# EAGLE board Keyboard (EAGLE 6.3), part 1 of 2
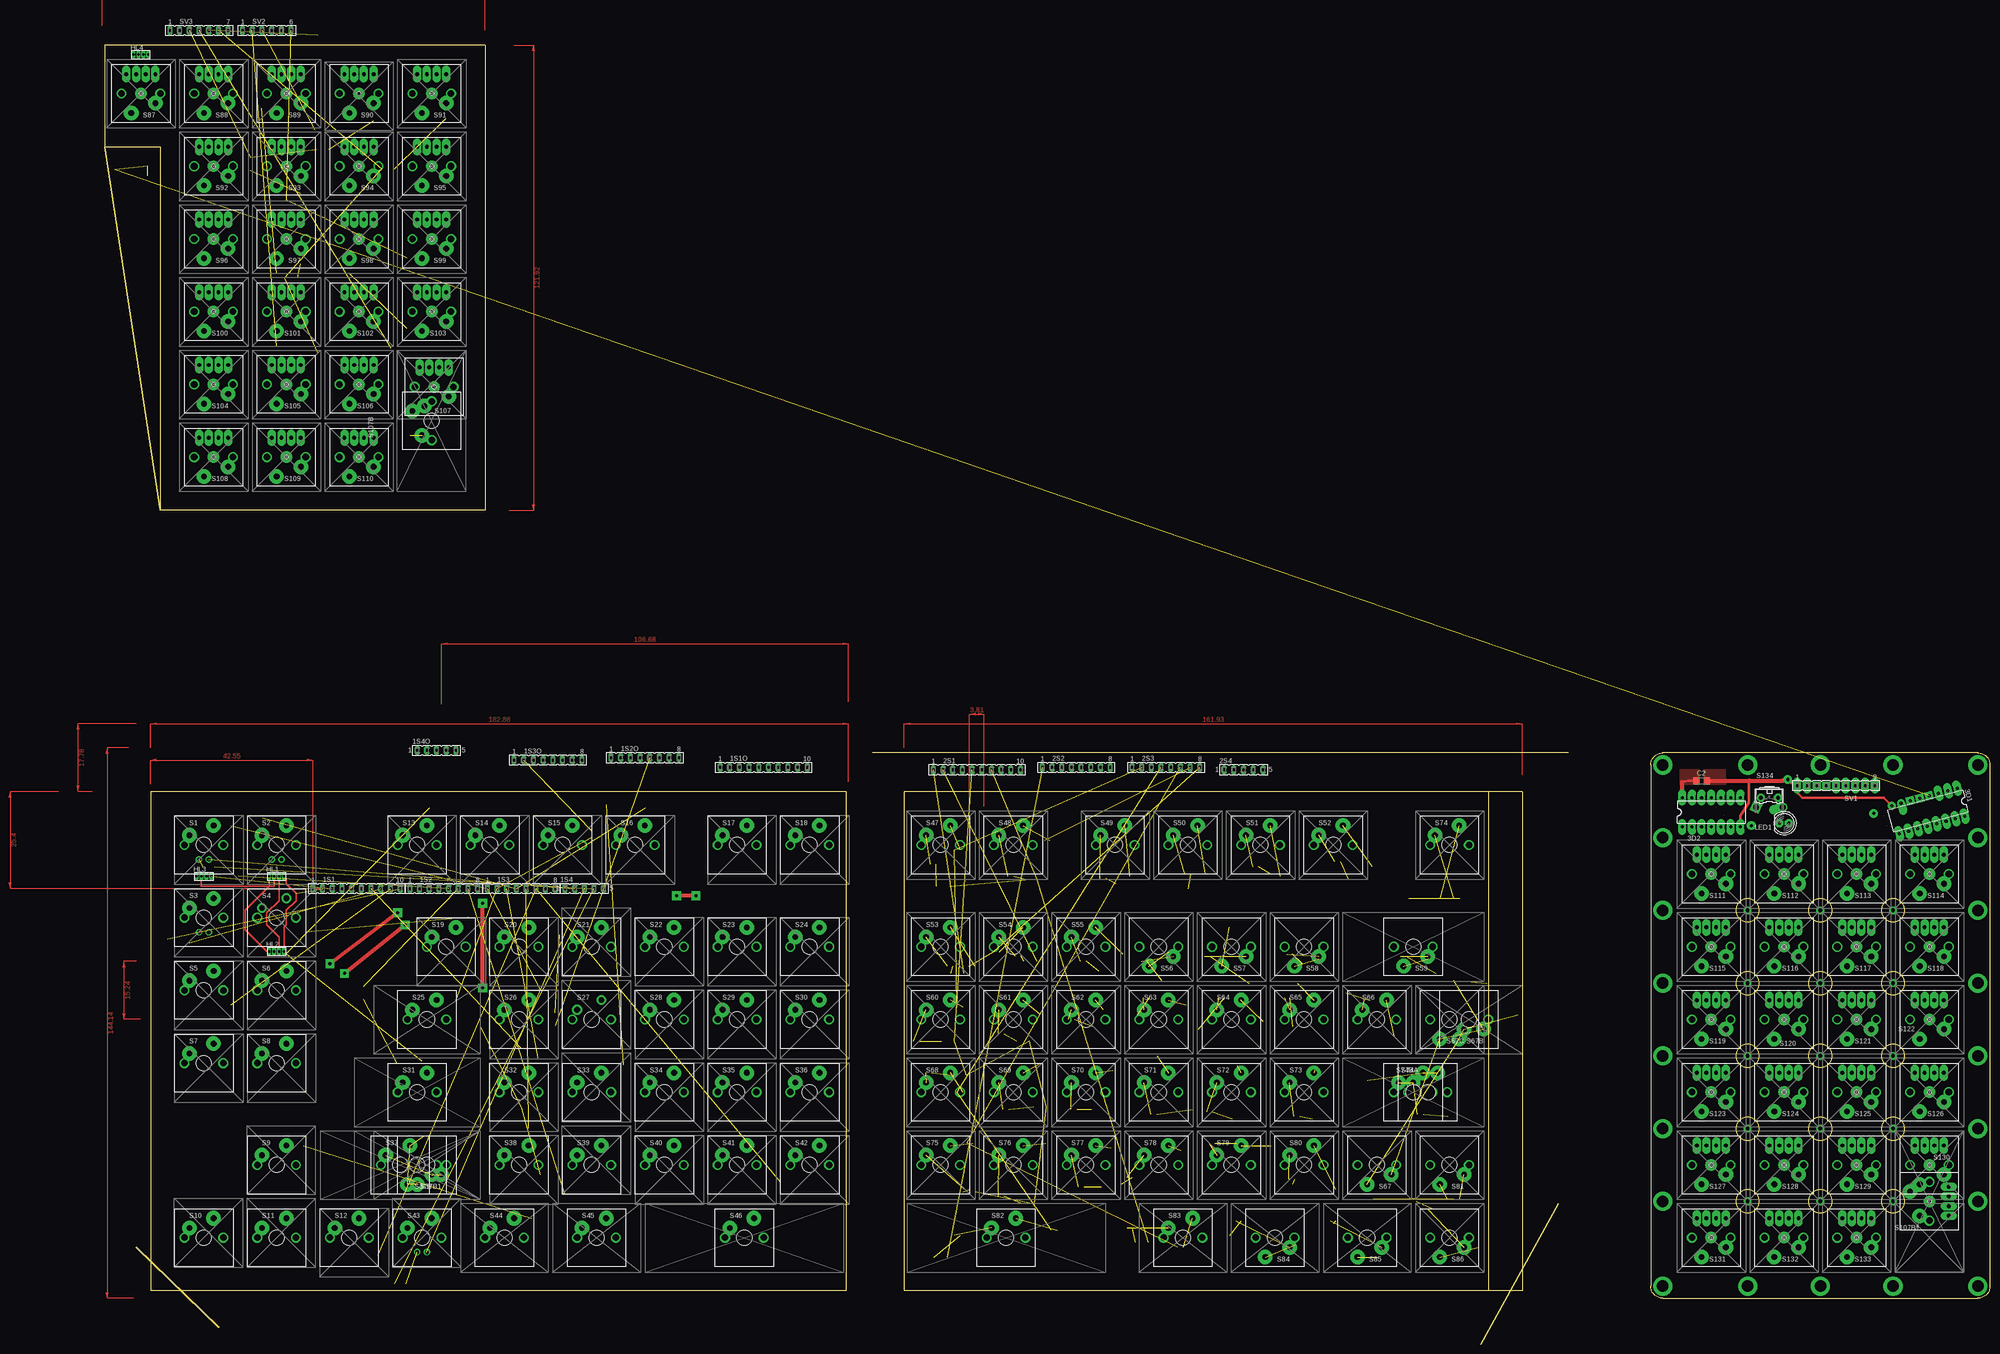
[diagram p0: board, top side]
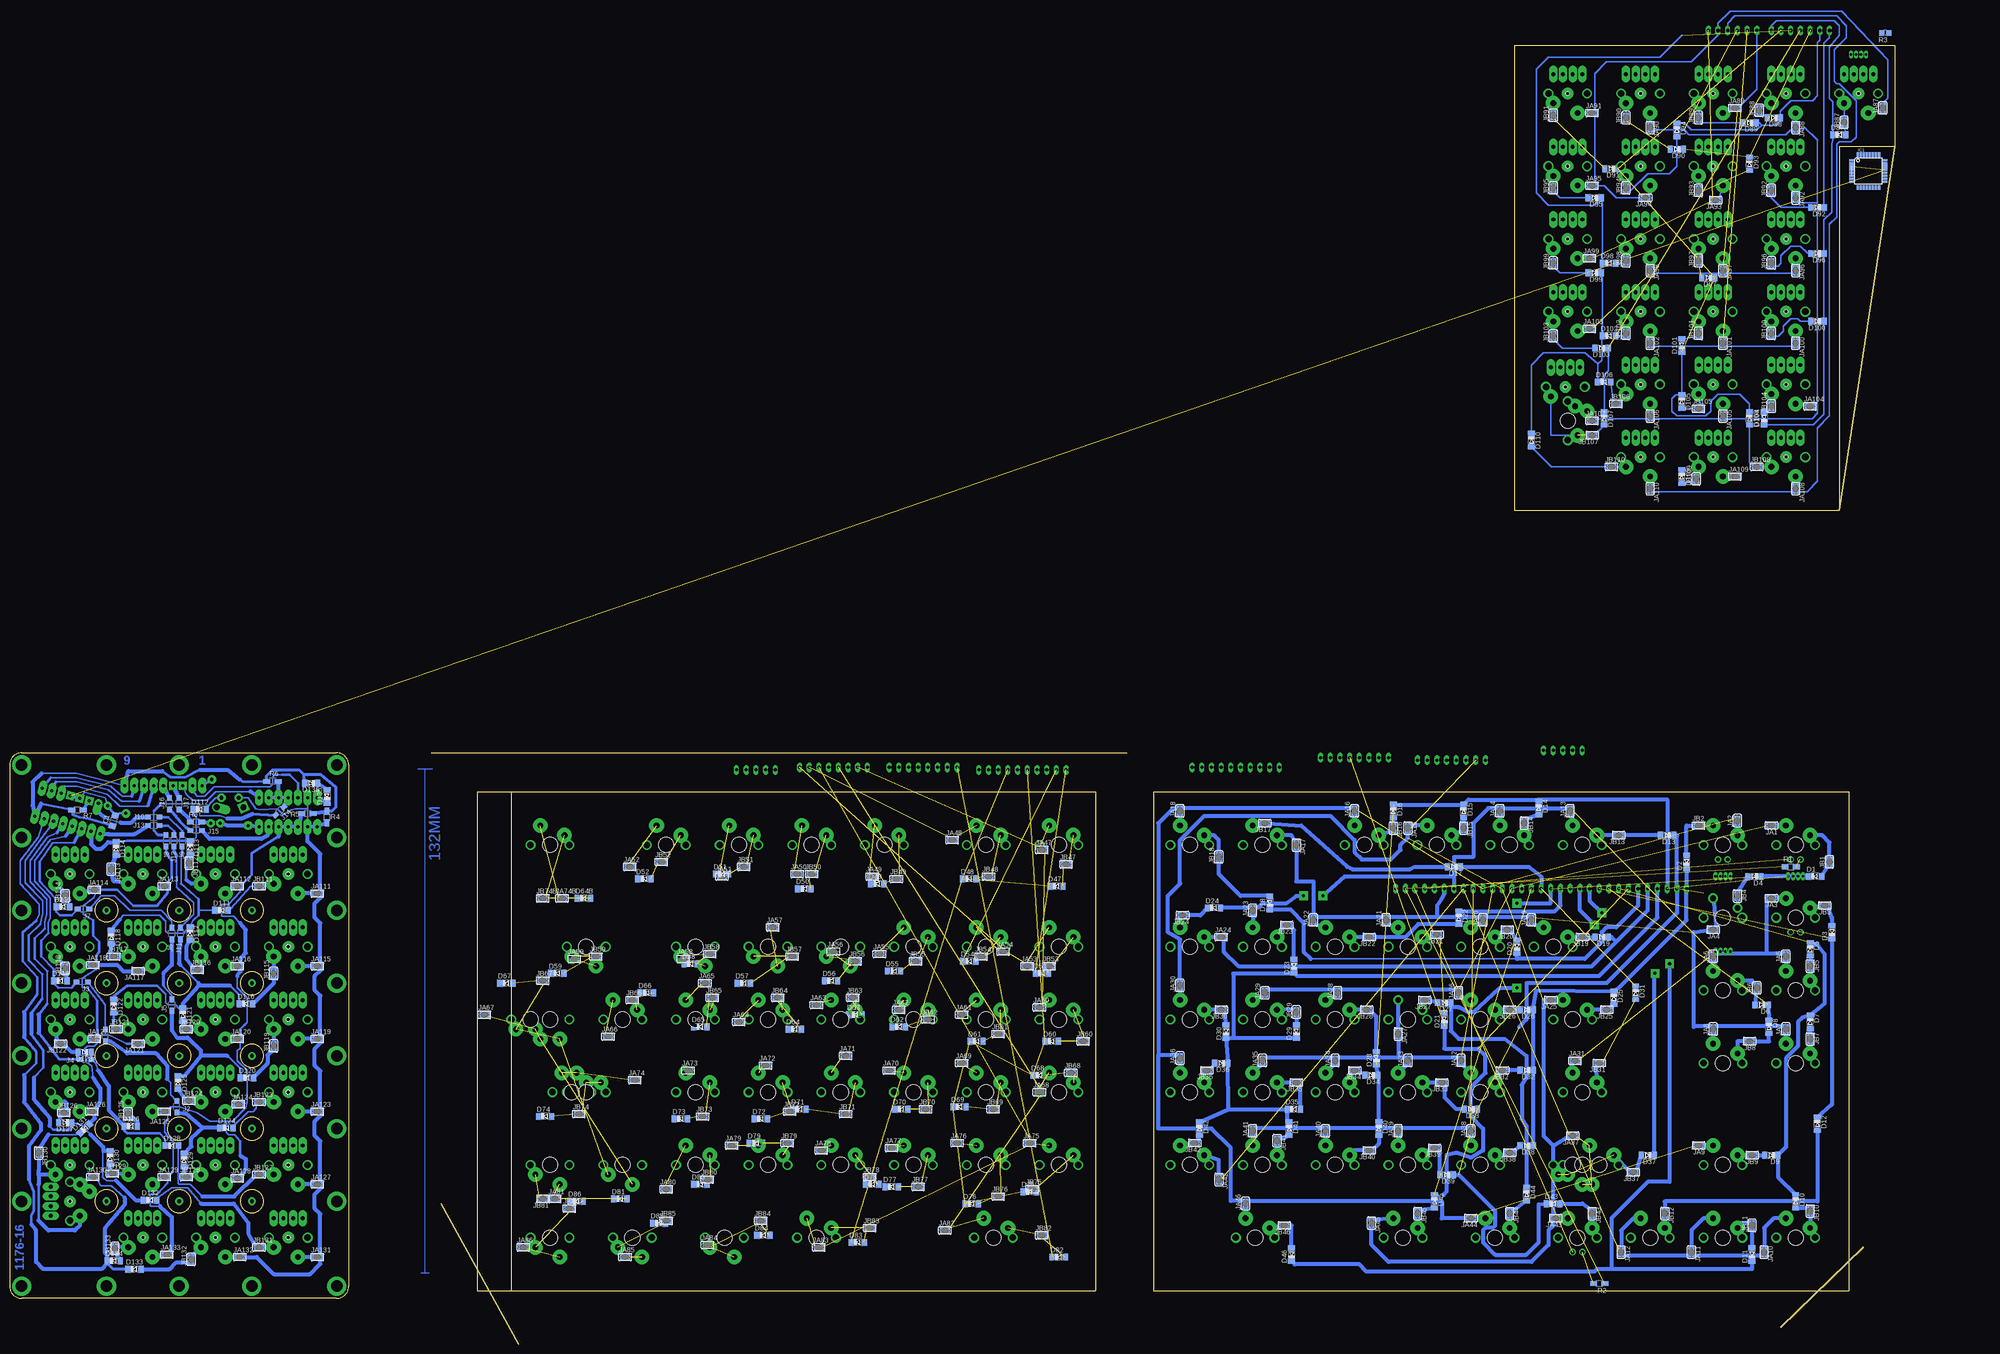
[diagram p1: board, bottom side, seen from below]

Size 494.03 x 340.36 mm. Coordinates in mm from the lower left corner, seen from the top.
Outline: 362.59,144.78 371.48,144.78 371.48,13.97 362.59,13.97
Outline: 362.59,144.78 209.55,144.78 209.55,13.97 362.59,13.97
Outline: 0,313.69 0,340.36 99.69,340.36 99.69,218.44 14.61,218.44
Outline: 383.54,154.94 201.3,154.94
Outline: 0,313.69 14.61,313.69 14.61,218.44
Outline: 0,313.69 14.61,218.44
Outline: 362.59,144.78 362.59,13.97
Outline: 8.26,25.4 29.84,4.45
Outline: 381,36.83 360.68,0
Outline: 194.31,144.78 194.31,13.97 12.06,13.97 12.06,144.78 194.31,144.78
Outline: 490.86,154.94 408.31,154.94 arc90 405.13,151.77 405.13,15.24 arc90 408.31,12.07 490.86,12.07 arc90 494.03,15.24 494.03,151.77 arc90 490.86,154.94
Outline: circle at 468.63,37.46 radius 3
Outline: circle at 468.63,113.66 radius 3
Outline: circle at 430.53,56.52 radius 3
Outline: circle at 449.58,56.52 radius 3
Outline: circle at 449.58,37.46 radius 3
Outline: circle at 430.53,37.46 radius 3
Outline: circle at 430.53,75.56 radius 3
Outline: circle at 430.53,94.61 radius 3
Outline: circle at 468.63,56.52 radius 3
Outline: circle at 468.63,75.56 radius 3
Outline: circle at 468.63,94.61 radius 3
Outline: circle at 449.58,94.61 radius 3
Outline: circle at 449.58,113.66 radius 3
Outline: circle at 430.53,113.66 radius 3
Outline: circle at 449.58,75.56 radius 3
Copper layers (1*16): Top 0.035mm / dielectric 1.5mm / Bottom 0.035mm
Design rules "default": minimum track width 10mil, minimum drill 24mil, track to track 8mil, track to pad 8mil, pad to pad 8mil, via to via 8mil, smd to smd 8mil, copper to edge 40mil, drill to drill 8mil, minimum pad ring 10mil, minimum via ring 8mil, stop-mask expansion 4mil, vias tented up to drill 0mil, thermal gap 10mil

## Footprints (pad centres in the part's own frame; a part is rotated, then mirrored left to right if it is on the bottom)
FE10 = drill 0.813 long: 1 -11.43,0; 2 -8.89,0; 3 -6.35,0; 4 -3.81,0; 5 -1.27,0; 6 1.27,0; 7 3.81,0; 8 6.35,0; 9 8.89,0; 10 11.43,0
FE08 = drill 0.813 long: 1 -8.89,0; 2 -6.35,0; 3 -3.81,0; 4 -1.27,0; 5 1.27,0; 6 3.81,0; 7 6.35,0; 8 8.89,0
FE05-1 = drill 0.813 long: 1 -5.08,0; 2 -2.54,0; 3 0,0; 4 2.54,0; 5 5.08,0
DIL16 = drill 0.813 pad 2.1 long: 1 -8.89,-3.81; 2 -6.35,-3.81; 3 -3.81,-3.81; 9 8.89,3.81; 10 6.35,3.81; 11 3.81,3.81; 12 1.27,3.81; 13 -1.27,3.81; 14 -3.81,3.81; 15 -6.35,3.81; 16 -8.89,3.81 | drill 0.813 pad 2.1 square: 4 -1.27,-3.81; 5 1.27,-3.81; 6 3.81,-3.81 | drill 0.813 pad 2.1 offset: 7 6.35,-3.81 | drill 0.813 pad 2.1: 8 8.89,-3.81
DIL14 = drill 0.813 pad 2.1 long: 1 -7.62,-3.81; 2 -5.08,-3.81; 3 -2.54,-3.81; 4 0,-3.81; 5 2.54,-3.81; 6 5.08,-3.81; 7 7.62,-3.81; 8 7.62,3.81; 9 5.08,3.81; 10 2.54,3.81; 11 0,3.81; 12 -2.54,3.81; 13 -5.08,3.81; 14 -7.62,3.81
C1206 = smd 1.6 x 1.8: 1 -1.4,0; 2 1.4,0
SOD80C = smd 1.4 x 1.8 bottom: A -1.7,0; C 1.7,0
RGB2X5 = drill 0.6 long: 1 -1.95,-0.585; 2 -0.65,-0.585; 3 0.65,-0.585; 4 1.95,-0.585
TQFP32-08 = smd 1.27 x 0.559: 1 -4.293,2.8; 2 -4.293,2; 3 -4.293,1.2; 4 -4.293,0.4; 5 -4.293,-0.4; 6 -4.293,-1.2; 7 -4.293,-2; 8 -4.293,-2.8; 17 4.293,-2.8; 18 4.293,-2; 19 4.293,-1.2; 20 4.293,-0.4; 21 4.293,0.4; 22 4.293,1.2; 23 4.293,2; 24 4.293,2.8 | smd 0.559 x 1.27: 9 -2.8,-4.293; 10 -2,-4.293; 11 -1.2,-4.293; 12 -0.4,-4.293; 13 0.4,-4.293; 14 1.2,-4.293; 15 2,-4.293; 16 2.8,-4.293; 25 2.8,4.293; 26 2,4.293; 27 1.2,4.293; 28 0.4,4.293; 29 -0.4,4.293; 30 -1.2,4.293; 31 -2,4.293; 32 -2.8,4.293
R1206W = smd 1.5 x 1.2: 1 -1.499,0; 2 1.499,0
SJ = smd 1.168 x 1.6: 1 -0.762,0; 2 0.762,0
SJ' = smd 1.168 x 1.6 bottom: 1 0.762,0; 2 -0.762,0
LED5MM = drill 0.813 pad 2.1 octagon: A -1.27,0; K 1.27,0
R1206W' = smd 1.8 x 1.2: 1 -1.499,0; 2 1.499,0
R0805 = smd 1.3 x 1.5: 1 -0.95,0; 2 0.95,0
CHERRY-MX-LED = drill 1.016 pad 1.676: LED1 -1.27,-3.81; LED2 1.27,-3.81 | drill 0.8 pad 1.27: P$1 0,0 | drill 1.714 pad 1.93: P$3 -5.08,0; P$4 5.08,0 | drill 1.5 pad 3.81: SW1 -3.81,2.54; SW2 2.54,5.08 | hole 4: 0,0
CHERRY-MX@1 = drill 1.714 pad 1.93: P$3 -5.08,0; P$4 5.08,0 | drill 1.5 pad 2.54: SW1 -3.81,2.54; SW2 2.54,5.08 | hole 4: 0,0
CHERRY-MX = drill 0.8: P$1 0,0 | drill 1.714 pad 1.93: P$3 -5.08,0; P$4 5.08,0 | drill 1.5 pad 3.81: SW1 -3.81,2.54; SW2 2.54,5.08 | hole 4: 0,0
CHERRY-MX-4P = drill 1.016 pad 2.184 long: D1 -3.81,-5.08; D2 3.81,-5.08; LED1 -1.27,-5.08; LED2 1.27,-5.08 | drill 1 pad 3: P$1 0,0 | drill 1.714 pad 1.93: P$3 -5.08,0; P$4 5.08,0 | drill 1.5 pad 3.81: SW1 -3.81,2.54; SW2 2.54,5.08 | hole 1: 0,0
B3F-31XX = drill 1.016 pad 2.1 octagon: 1 -2.261,-1.245; 2 2.261,-1.245 | drill 1.499 pad 2.5 offset: 3 -3.505,1.245 | drill 1.499 pad 2.5 square: 4 3.505,1.245
FE09 = drill 0.813 pad 2.1 long: 1 -10.16,0; 2 -7.62,0; 5 0,0; 6 2.54,0; 7 5.08,0; 8 7.62,0; 9 10.16,0 | drill 0.813 pad 2.1 square: 3 -5.08,0; 4 -2.54,0
FE06 = drill 0.813 long: 1 -6.35,0; 2 -3.81,0; 3 -1.27,0; 4 1.27,0; 5 3.81,0; 6 6.35,0
FE07 = drill 0.813 long: 1 -7.62,0; 2 -5.08,0; 3 -2.54,0; 4 0,0; 5 2.54,0; 6 5.08,0; 7 7.62,0

## Placement (x,y rotation side)
1S1  [FE10]  66.04,119.38 0 top
1S1O  [FE10]  172.72,151.13 0 top
1S2  [FE08]  88.9,119.38 0 top
1S2O  [FE08]  141.61,153.67 0 top
1S3  [FE08]  109.22,119.38 0 top
1S3O  [FE08]  116.2,153.04 0 top
1S4  [FE05-1]  125.73,119.38 0 top
1S4O  [FE05-1]  86.99,155.58 0 top
2S1  [FE10]  228.6,150.5 0 top
2S2  [FE08]  254.64,151.13 0 top
2S3  [FE08]  278.13,151.13 0 top
2S4  [FE05-1]  298.45,150.5 0 top
3D1  74HC138N  [DIL16]  477.84,139.7 195 top
3D2  К155ЛА4  [DIL14]  421,139.38 0 top
C1  [C1206]  466.73,137.16 75 bottom
C2  [C1206]  418.47,147.64 0 top
D1  LL4148  [SOD80C]  20.95,122.55 0 top
D2  LL4148  [SOD80C]  54.61,126.36 270 top
D3  LL4148  [SOD80C]  16.51,107.95 270 top
D4  LL4148  [SOD80C]  36.83,122.55 180 top
D5  LL4148  [SOD80C]  22.22,103.5 90 top
D6  LL4148  [SOD80C]  34.93,88.9 180 top
D7  LL4148  [SOD80C]  22.22,84.45 90 top
D8  LL4148  [SOD80C]  33.02,83.19 90 top
D9  LL4148  [SOD80C]  32.39,49.53 180 top
D10  LL4148  [SOD80C]  26.04,37.46 90 top
D11  LL4148  [SOD80C]  37.47,23.49 270 top
D12  LL4148  [SOD80C]  20.32,57.78 90 top
D13  LL4148  [SOD80C]  59.69,133.35 180 top
D14  LL4148  [SOD80C]  93.34,140.5 90 top
D15  LL4148  [SOD80C]  113.03,139.7 90 top
D16  LL4148  [SOD80C]  131.45,139.7 90 top
D17  LL4148  [SOD80C]  115.57,125.09 180 top
D18  LL4148  [SOD80C]  163.83,115.57 270 top
D19  LL4148  [SOD80C]  76.83,106.68 180 top
D20  LL4148  [SOD80C]  99.06,104.14 270 top
D21  LL4148  [SOD80C]  118.11,85.09 270 top
D22  LL4148  [SOD80C]  114.3,111.76 90 top
D23  LL4148  [SOD80C]  157.48,99.06 270 top
D24  LL4148  [SOD80C]  178.44,114.3 0 top
D25  LL4148  [SOD80C]  73.66,90.8 90 top
D26  LL4148  [SOD80C]  96.52,87.63 180 top
D27  LL4148  [SOD80C]  118.11,89.53 180 top
D28  LL4148  [SOD80C]  135.89,74.93 270 top
D29  LL4148  [SOD80C]  156.84,81.91 270 top
D30  LL4148  [SOD80C]  175.26,81.91 270 top
D31  LL4148  [SOD80C]  67.94,92.08 90 top
D32  LL4148  [SOD80C]  96.52,71.75 180 top
D33  LL4148  [SOD80C]  111.12,61.59 180 top
D34  LL4148  [SOD80C]  137.16,70.48 180 top
D35  LL4148  [SOD80C]  157.48,61.59 0 top
D36  LL4148  [SOD80C]  176.53,73.66 180 top
D37  LL4148  [SOD80C]  64.77,49.53 180 top
D38  LL4148  [SOD80C]  96.52,52.07 180 top
D39  LL4148  [SOD80C]  117.47,44.45 180 top
D40  LL4148  [SOD80C]  135.25,56.52 90 top
D41  LL4148  [SOD80C]  158.75,56.52 90 top
D42  LL4148  [SOD80C]  182.25,56.52 90 top
D43  LL4148  [SOD80C]  89.53,36.83 0 top
D44  LL4148  [SOD80C]  96.52,39.37 90 top
D45  LL4148  [SOD80C]  120.65,37.46 90 top
D46  LL4148  [SOD80C]  158.12,23.49 270 top
D47  LL4148  [SOD80C]  219.71,120.02 0 top
D48  LL4148  [SOD80C]  242.57,121.92 0 top
D49  LL4148  [SOD80C]  266.7,120.65 0 top
D50  LL4148  [SOD80C]  285.75,119.38 0 top
D51  LL4148  [SOD80C]  307.34,123.19 0 top
D52  LL4148  [SOD80C]  327.66,121.92 0 top
D53  LL4148  [SOD80C]  223.52,97.16 0 top
D54  LL4148  [SOD80C]  242.57,100.33 0 top
D55  LL4148  [SOD80C]  262.25,97.79 0 top
D56  LL4148  [SOD80C]  278.76,95.25 0 top
D57  LL4148  [SOD80C]  301.62,94.61 0 top
D58  LL4148  [SOD80C]  315.6,99.69 0 top
D59  LL4148  [SOD80C]  350.52,97.16 0 top
D60  LL4148  [SOD80C]  220.98,79.38 0 top
D61  LL4148  [SOD80C]  240.67,79.38 0 top
D62  LL4148  [SOD80C]  260.99,83.19 0 top
D63  LL4148  [SOD80C]  272.42,86.36 0 top
D64  LL4148  [SOD80C]  288.29,82.55 0 top
D64B  LL4148  [SOD80C]  343.54,116.84 0 top
D65  LL4148  [SOD80C]  313.06,83.19 0 top
D66  LL4148  [SOD80C]  327.03,92.08 0 top
D67  LL4148  [SOD80C]  363.86,94.61 0 top
D68  LL4148  [SOD80C]  224.16,70.48 0 top
D69  LL4148  [SOD80C]  245.11,62.23 0 top
D70  LL4148  [SOD80C]  260.35,61.59 0 top
D71  LL4148  [SOD80C]  287.02,61.59 0 top
D72  LL4148  [SOD80C]  297.18,59.05 0 top
D73  LL4148  [SOD80C]  318.13,59.05 0 top
D74  LL4148  [SOD80C]  353.69,59.69 0 top
D75  LL4148  [SOD80C]  226.7,40 0 top
D76  LL4148  [SOD80C]  241.94,36.83 0 top
D77  LL4148  [SOD80C]  262.89,41.27 0 top
D78  LL4148  [SOD80C]  267.97,41.91 0 top
D79  LL4148  [SOD80C]  298.45,52.7 0 top
D80  LL4148  [SOD80C]  313.06,41.91 0 top
D81  LL4148  [SOD80C]  334.01,38.1 0 top
D82  LL4148  [SOD80C]  219.08,22.86 0 top
D83  LL4148  [SOD80C]  271.78,26.67 0 top
D84  LL4148  [SOD80C]  296.55,28.58 0 top
D85  LL4148  [SOD80C]  323.85,31.75 0 top
D86  LL4148  [SOD80C]  345.44,37.46 0 top
D87  LL4148  [SOD80C]  14.61,316.87 0 top
D88  LL4148  [SOD80C]  31.75,321.31 180 top
D89  LL4148  [SOD80C]  38.1,320.04 180 top
D90  LL4148  [SOD80C]  57.15,313.06 180 top
D91  LL4148  [SOD80C]  74.3,307.97 180 top
D92  LL4148  [SOD80C]  20.32,297.81 180 top
D93  LL4148  [SOD80C]  38.1,309.25 90 top
D94  LL4148  [SOD80C]  57.15,318.13 90 top
D95  LL4148  [SOD80C]  78.74,300.35 180 top
D96  LL4148  [SOD80C]  20.32,285.75 180 top
D97  LL4148  [SOD80C]  48.9,279.4 180 top
D98  LL4148  [SOD80C]  74.93,283.21 0 top
D99  LL4148  [SOD80C]  78.74,280.67 180 top
D100  LL4148  [SOD80C]  20.32,267.97 180 top
D101  LL4148  [SOD80C]  55.88,261.62 270 top
D102  LL4148  [SOD80C]  74.93,264.16 0 top
D103  LL4148  [SOD80C]  76.83,260.99 180 top
D104  LL4148  [SOD80C]  34.29,242.57 270 top
D105  LL4148  [SOD80C]  55.88,247.02 90 top
D106  LL4148  [SOD80C]  76.2,252.09 0 top
D107  LL4148  [SOD80C]  76.2,242.57 90 top
D108  LL4148  [SOD80C]  38.1,242.57 90 top
D109  LL4148  [SOD80C]  55.88,227.33 90 top
D110  LL4148  [SOD80C]  95.25,236.86 90 top
D111  LL4148  [SOD80C]  438.47,113.66 0 top
D112  LL4148  [SOD80C]  444.2,140.14 0 top
D113  LL4148  [SOD80C]  446.72,130.18 90 top
D114  LL4148  [SOD80C]  466.09,129.86 90 top
D115  LL4148  [SOD80C]  480.06,114.62 0 top
D116  LL4148  [SOD80C]  432.12,89.22 0 top
D117  LL4148  [SOD80C]  446.72,107.63 90 top
D118  LL4148  [SOD80C]  467.36,106.68 90 top
D119  LL4148  [SOD80C]  480.69,95.25 0 top
D120  LL4148  [SOD80C]  431.8,69.85 0 top
D121  LL4148  [SOD80C]  448.63,86.36 90 top
D122  LL4148  [SOD80C]  466.73,88.58 90 top
D123  LL4148  [SOD80C]  474.35,76.52 180 top
D124  LL4148  [SOD80C]  437.2,56.67 0 top
D125  LL4148  [SOD80C]  449.9,68.58 90 top
D126  LL4148  [SOD80C]  462.28,57.15 0 top
D127  LL4148  [SOD80C]  479.43,58.1 180 top
D128  LL4148  [SOD80C]  451.49,52.07 0 top
D129  LL4148  [SOD80C]  448.31,48.26 90 top
D130  LL4148  [SOD80C]  467.68,48.89 90 top
D131  LL4148  [SOD80C]  474.35,56.52 315 top
D132  LL4148  [SOD80C]  457.2,37.78 0 top
D133  LL4148  [SOD80C]  461.33,19.69 0 top
D134  LL4148  [SOD80C]  466.73,21.91 0 top
D135  LL4148  [SOD80C]  410.85,143.51 270 top
D136  LL4148  [SOD80C]  414.97,147 180 top
HL1  [RGB2X5]  45.09,123.19 0 top
HL2  [RGB2X5]  45.09,103.5 0 top
HL3  [RGB2X5]  26.04,123.19 0 top
HL4  [RGB2X5]  9.53,338.45 0 top
IC1  MEGA8-AI  [TQFP32-08]  6.99,307.34 0 bottom
J1  J  [R1206W]  468.95,80.96 90 bottom
J2  J  [R1206W]  450.22,62.23 90 bottom
J3  J  [R1206W]  474.98,94.93 180 bottom
J4  J  [R1206W]  474.03,74.61 180 bottom
J5  J  [R1206W]  451.49,88.9 90 bottom
J6  J  [R1206W]  451.49,107.63 90 bottom
J7  J  [R1206W]  474.66,113.98 180 bottom
J8  J  [R1206W]  453.01,131.89 270 bottom
J9  J  [R1206W]  448.82,131.89 270 bottom
J10  J  [R1206W]  456.25,138.11 0 bottom
J11  J  [R1206W]  449.26,107.63 270 bottom
J12  J  [R1206W]  450.91,131.89 90 bottom
J13  J  [R1206W]  456.25,135.89 180 bottom
J14  J  [R1206W]  423.23,139.7 225 bottom
J15  J  [R1206W]  445.13,134.62 180 bottom
J16  J  [R1206W]  452.12,141.61 90 bottom
J17  J  [R1206W]  449.58,141.61 90 bottom
JA1  [SJ]  32.39,135.89 180 bottom
JA2  [SJ]  41.27,137.16 90 bottom
JA3  [SJ]  32.39,116.84 180 bottom
JA4  [SJ]  47.62,108.58 180 bottom
JA5  [SJ]  28.57,101.6 90 bottom
JA6  [SJ]  47.62,101.6 90 bottom
JA7  [SJ]  28.57,82.55 90 bottom
JA8  [SJ]  47.62,82.55 90 bottom
JA9  [SJ]  51.44,52.07 180 bottom
JA10  [SJ]  34.29,24.13 270 bottom
JA11  [SJ]  53.34,24.13 270 bottom
JA12  [SJ]  71.75,24.13 270 bottom
JA13  [SJ']  85.09,139.7 270 top
JA14  [SJ']  103.5,139.7 270 top
JA15  [SJ']  127.64,135.26 90 top
JA16  [SJ']  141.61,139.7 270 top
JA17  [SJ']  156.84,130.81 90 top
JA18  [SJ']  187.33,139.7 270 top
JA19  [SJ']  95.25,111.12 270 top
JA20  [SJ']  107.95,111.12 270 top
JA21  [SJ']  133.35,111.12 270 top
JA22  [SJ']  152.4,111.12 270 top
JA23  [SJ']  168.28,113.66 270 top
JA24  [SJ']  176.53,106.68 0 top
JA25  [SJ']  90.17,90.17 180 top
JA26  [SJ']  114.3,92.08 270 top
JA27  [SJ']  130.18,81.28 90 top
JA28  [SJ']  146.05,92.08 270 top
JA29  [SJ']  165.1,92.08 270 top
JA30  [SJ']  187.33,93.98 270 top
JA31  [SJ']  83.82,74.3 0 top
JA32  [SJ']  113.66,74.3 270 top
JA33  [SJ']  127.64,74.3 270 top
JA34  [SJ']  146.69,74.3 270 top
JA35  [SJ']  165.74,74.3 270 top
JA36  [SJ']  187.33,74.93 270 top
JA37  [SJ']  84.45,54.61 180 top
JA38  [SJ']  111.12,55.88 270 top
JA39  [SJ']  130.18,55.88 270 top
JA40  [SJ']  149.23,55.88 270 top
JA41  [SJ']  168.28,55.88 270 top
JA42  [SJ']  177.17,43.18 90 top
JA43  [SJ']  88.9,33.02 180 top
JA44  [SJ']  111.12,33.02 180 top
JA45  [SJ']  137.16,31.75 90 top
JA46  [SJ']  170.18,36.83 270 top
JA47  [SJ']  223.52,129.54 0 top
JA48  [SJ']  247.02,132.08 0 top
JA49  [SJ']  267.97,122.55 0 top
JA50  [SJ']  287.66,123.19 0 top
JA51  [SJ']  307.34,122.55 0 top
JA52  [SJ']  331.47,125.09 0 top
JA53  [SJ']  227.33,99.06 0 top
JA54  [SJ']  233.68,102.87 0 top
JA55  [SJ']  266.06,102.23 0 top
JA56  [SJ']  278.13,102.87 0 top
JA57  [SJ']  294,109.22 0 top
JA58  [SJ']  317.5,100.97 0 top
JA59  [SJ']  346.07,100.97 0 top
JA60  [SJ']  224.16,88.27 0 top
JA61  [SJ']  244.48,86.36 0 top
JA62  [SJ']  260.99,87.63 0 top
JA63  [SJ']  282.57,88.9 0 top
JA64  [SJ']  302.89,84.45 0 top
JA65  [SJ']  311.79,94.61 0 top
JA66  [SJ']  337.19,80.64 0 top
JA67  [SJ']  369.57,86.36 0 top
JA68  [SJ']  224.16,66.04 0 top
JA69  [SJ']  244.48,73.66 0 top
JA70  [SJ']  263.53,71.75 0 top
JA71  [SJ']  274.95,75.56 0 top
JA72  [SJ']  295.91,73.02 0 top
JA73  [SJ']  316.23,71.75 0 top
JA74  [SJ']  330.2,69.22 0 top
JA74B  [SJ']  349.25,116.84 0 top
JA75  [SJ']  226.7,52.7 0 top
JA76  [SJ']  245.75,52.7 0 top
JA77  [SJ']  262.89,51.43 0 top
JA78  [SJ']  281.31,50.8 0 top
JA79  [SJ']  304.8,52.07 0 top
JA80  [SJ']  321.94,40.64 0 top
JA81  [SJ']  351.16,38.1 0 top
JA82  [SJ']  248.92,29.84 0 top
JA83  [SJ']  281.94,25.4 0 top
JA84  [SJ']  311.15,26.03 0 top
JA85  [SJ']  332.74,22.86 0 top
JA86  [SJ']  359.41,25.4 0 top
JA87  [SJ']  3.17,323.85 270 top
JA88  [SJ']  26.04,318.77 90 top
JA89  [SJ']  41.91,323.85 0 top
JA90  [SJ']  64.13,318.77 90 top
JA91  [SJ']  79.38,322.58 0 top
JA92  [SJ']  26.04,300.35 90 top
JA93  [SJ']  46.99,299.72 180 top
JA94  [SJ']  65.41,300.35 180 top
JA95  [SJ']  79.38,303.53 0 top
JA96  [SJ']  26.04,281.31 90 top
JA97  [SJ']  45.09,281.31 90 top
JA98  [SJ']  64.13,281.31 90 top
JA99  [SJ']  80.01,284.48 0 top
JA100  [SJ']  26.04,262.25 90 top
JA101  [SJ']  45.09,262.25 90 top
JA102  [SJ']  64.13,262.25 90 top
JA103  [SJ']  80.01,266.06 0 top
JA104  [SJ']  22.22,245.75 0 top
JA105  [SJ']  45.09,243.21 90 top
JA106  [SJ']  64.13,243.21 90 top
JA107  [SJ']  79.38,241.94 0 top
JA108  [SJ']  26.04,224.16 90 top
JA109  [SJ']  41.91,227.33 0 top
JA110  [SJ']  64.13,224.16 90 top
JA111  [SJ']  413.38,118.11 0 top
JA112  [SJ']  434.34,120.02 0 top
JA113  [SJ']  453.39,120.02 0 top
JA114  [SJ']  471.81,119.06 0 top
JA115  [SJ']  413.38,99.06 0 top
JA116  [SJ']  434.34,99.06 0 top
JA117  [SJ']  460.38,97.79 180 top
JA118  [SJ']  472.12,99.38 0 top
JA119  [SJ']  413.38,80.01 0 top
JA120  [SJ']  434.34,80.01 0 top
JA121  [SJ']  460.38,78.74 180 top
JA122  [SJ']  471.81,80.01 0 top
JA123  [SJ']  413.38,60.96 0 top
JA124  [SJ']  434.02,62.86 0 top
JA125  [SJ']  453.39,60.96 0 top
JA126  [SJ']  472.44,60.96 0 top
JA127  [SJ']  413.38,41.91 0 top
JA128  [SJ']  434.34,43.5 0 top
JA129  [SJ']  453.39,43.81 0 top
JA130  [SJ']  472.12,43.81 0 top
JA131  [SJ']  413.38,22.86 0 top
JA132  [SJ']  433.7,22.86 0 top
JA133  [SJ']  452.75,23.49 0 top
JB1  [SJ']  17.14,126.36 270 top
JB2  [SJ]  51.44,135.89 0 bottom
JB3  [SJ']  18.41,114.94 180 top
JB4  [SJ]  41.27,117.47 270 bottom
JB5  [SJ]  22.22,99.06 270 bottom
JB6  [SJ]  36.2,93.34 90 bottom
JB7  [SJ]  22.22,80.01 270 bottom
JB8  [SJ]  38.1,79.38 180 bottom
JB9  [SJ]  37.47,49.53 180 bottom
JB10  [SJ]  22.22,34.92 270 bottom
JB11  [SJ]  37.47,31.12 90 bottom
JB12  [SJ]  60.33,34.29 270 bottom
JB13  [SJ]  72.39,133.35 180 bottom
JB14  [SJ]  97.16,136.53 270 bottom
JB15  [SJ]  113.03,135.26 270 bottom
JB16  [SJ]  131.45,135.26 270 bottom
JB17  [SJ]  165.1,136.53 180 bottom
JB18  [SJ']  177.17,127.64 270 top
JB19  [SJ']  81.91,106.68 180 top
JB20  [SJ']  101.6,108.58 180 top
JB21  [SJ']  120.02,107.31 180 top
JB22  [SJ']  137.8,106.68 180 top
JB23  [SJ']  159.39,109.86 180 top
JB24  [SJ']  186.69,112.39 180 top
JB25  [SJ']  75.56,87.63 180 top
JB26  [SJ']  100.96,87.63 180 top
JB27  [SJ']  123.19,90.17 180 top
JB28  [SJ']  138.43,87.63 180 top
JB29  [SJ']  156.84,87 270 top
JB30  [SJ']  176.53,87.63 180 top
JB31  [SJ']  77.47,73.66 180 top
JB32  [SJ']  102.87,71.75 180 top
JB33  [SJ']  118.74,68.58 180 top
JB34  [SJ']  141.61,71.75 180 top
JB35  [SJ']  156.84,68.58 180 top
JB36  [SJ']  180.34,71.75 180 top
JB37  [SJ']  68.58,45.09 180 top
JB38  [SJ']  100.96,50.16 180 top
JB39  [SJ']  120.65,51.43 180 top
JB40  [SJ']  137.8,50.8 180 top
JB41  [SJ']  161.93,53.34 90 top
JB42  [SJ']  183.52,52.7 180 top
JB43  [SJ']  79.38,34.29 90 top
JB44  [SJ']  100.96,34.29 90 top
JB45  [SJ']  125.09,34.29 90 top
JB46  [SJ']  160.02,31.12 180 top
JB47  [SJ']  217.17,125.73 0 top
JB48  [SJ']  237.49,122.55 0 top
JB49  [SJ']  261.62,121.92 0 top
JB50  [SJ']  283.85,123.19 0 top
JB51  [SJ']  301.62,125.09 0 top
JB52  [SJ']  323.22,126.36 0 top
JB53  [SJ']  221.62,99.06 0 top
JB54  [SJ']  239.4,101.6 0 top
JB55  [SJ']  256.54,100.33 0 top
JB56  [SJ']  272.42,100.33 0 top
JB57  [SJ']  288.93,101.6 0 top
JB58  [SJ']  310.51,102.23 0 top
JB59  [SJ']  340.36,101.6 0 top
JB60  [SJ']  212.73,79.38 0 top
JB61  [SJ']  234.95,81.28 0 top
JB62  [SJ']  253.37,85.09 0 top
JB63  [SJ']  273.05,90.8 0 top
JB64  [SJ']  292.74,90.8 0 top
JB65  [SJ']  309.88,90.8 0 top
JB66  [SJ']  330.84,90.17 0 top
JB67  [SJ']  354.33,95.25 0 top
JB68  [SJ']  215.9,71.12 0 top
JB69  [SJ']  236.22,61.59 0 top
JB70  [SJ']  254,61.59 0 top
JB71  [SJ']  274.95,60.32 0 top
JB72  [SJ']  289.56,60.96 0 top
JB73  [SJ']  312.42,59.69 0 top
JB74  [SJ']  344.81,60.32 0 top
JB74B  [SJ']  354.33,116.84 0 top
JB75  [SJ']  226.06,40.64 0 top
JB76  [SJ']  234.95,38.73 0 top
JB77  [SJ']  255.91,41.27 0 top
JB78  [SJ']  268.61,43.81 0 top
JB79  [SJ']  290.19,52.7 0 top
JB80  [SJ']  311.15,43.18 0 top
JB81  [SJ']  354.33,38.1 180 top
JB82  [SJ']  223.52,28.58 0 top
JB83  [SJ']  268.61,30.48 0 top
JB84  [SJ']  297.18,32.38 0 top
JB85  [SJ']  321.94,32.38 0 top
JB86  [SJ']  347.35,35.56 0 top
JB87  [SJ']  13.34,320.04 270 top
JB88  [SJ']  35.56,323.21 270 top
JB89  [SJ']  51.44,321.31 270 top
JB90  [SJ']  70.48,321.31 270 top
JB91  [SJ']  89.53,321.94 270 top
JB92  [SJ']  32.39,302.26 270 top
JB93  [SJ']  51.44,302.26 270 top
JB94  [SJ']  70.48,302.89 270 top
JB95  [SJ']  89.53,302.89 270 top
JB96  [SJ']  32.39,283.21 270 top
JB97  [SJ']  51.44,283.84 270 top
JB98  [SJ']  70.48,283.84 270 top
JB99  [SJ']  89.53,283.21 270 top
JB100  [SJ']  32.39,264.79 270 top
JB101  [SJ']  51.44,264.79 270 top
JB102  [SJ']  70.48,264.79 270 top
JB103  [SJ']  89.53,264.16 270 top
JB104  [SJ']  32.39,245.75 270 top
JB105  [SJ']  51.44,245.11 0 top
JB106  [SJ']  73.02,246.38 0 top
JB107  [SJ']  79.38,238.12 180 top
JB108  [SJ']  36.2,229.87 0 top
JB109  [SJ']  52.07,226.7 270 top
JB110  [SJ']  74.3,229.87 0 top
JB111  [SJ']  428.62,120.02 0 top
JB112  [SJ']  447.04,126.05 90 top
JB113  [SJ']  467.36,124.46 90 top
JB114  [SJ']  479.43,117.47 270 top
JB115  [SJ']  424.81,97.16 270 top
JB116  [SJ']  444.82,98.11 0 top
JB117  [SJ']  466.73,101.6 0 top
JB118  [SJ']  479.43,98.42 270 top
JB119  [SJ']  424.81,78.11 270 top
JB120  [SJ']  447.68,82.55 0 top
JB121  [SJ']  466.09,82.55 0 top
JB122  [SJ']  480.69,78.74 180 top
JB123  [SJ']  428.62,63.5 0 top
JB124  [SJ']  447.04,63.82 0 top
JB125  [SJ']  462.92,60.32 270 top
JB126  [SJ']  479.74,60.64 0 top
JB127  [SJ']  428.62,44.45 0 top
JB128  [SJ']  447.68,43.81 0 top
JB129  [SJ']  467.04,44.77 0 top
JB130  [SJ']  486.41,50.16 90 top
JB131  [SJ']  428.62,25.4 0 top
JB132  [SJ']  446.41,22.23 270 top
JB133  [SJ']  466.41,25.08 270 top
LED1  [LED5MM]  440.06,136.53 180 top
R1  1k  [R1206W']  27.3,125.09 0 bottom
R2  1k  [R1206W']  77.47,15.88 180 bottom
R3  1k  [R0805]  2.54,343.53 180 bottom  (outside the outline)
R4  10k  [R1206W']  410.85,138.11 90 bottom
R5  10k  [R1206W']  415.93,139.07 0 bottom
R6  10k  [R1206W']  425.13,147.48 180 bottom
R7  [R1206W']  476.25,140.02 0 bottom
R8  [R1206W']  445.13,136.84 0 bottom
S1  Scroll Lock  [CHERRY-MX-LED]  26.04,130.81 0 top
S2  ESC  [CHERRY-MX-LED]  45.09,130.81 0 top
S3  Ins  [CHERRY-MX-LED]  26.04,111.76 0 top
S4  Pause  [CHERRY-MX@1]  45.09,111.76 0 top
S5  Home  [CHERRY-MX]  26.04,92.71 0 top
S6  P Up  [CHERRY-MX]  45.09,92.71 0 top
S7  End  [CHERRY-MX]  26.04,73.66 0 top
S8  P Dn  [CHERRY-MX]  45.09,73.66 0 top
S9  Up  [CHERRY-MX]  45.09,46.99 0 top
S10  Left  [CHERRY-MX]  26.04,27.94 0 top
S11  Down  [CHERRY-MX]  45.09,27.94 0 top
S12  Right  [CHERRY-MX]  64.13,27.94 0 top
S13  F1  [CHERRY-MX]  81.91,130.81 0 top
S14  F2  [CHERRY-MX]  100.96,130.81 0 top
S15  F3  [CHERRY-MX]  120.02,130.81 0 top
S16  F4  [CHERRY-MX]  139.06,130.81 0 top
S17  F5  [CHERRY-MX]  165.74,130.81 0 top
S18  F6  [CHERRY-MX]  184.78,130.81 0 top
S19  1  [CHERRY-MX]  89.53,104.14 0 top
S20  2  [CHERRY-MX]  108.58,104.14 0 top
S21  3  [CHERRY-MX]  127.64,104.14 0 top
S22  4  [CHERRY-MX]  146.69,104.14 0 top
S23  5  [CHERRY-MX]  165.74,104.14 0 top
S24  6  [CHERRY-MX]  184.78,104.14 0 top
S25  TAB  [CHERRY-MX]  84.45,85.09 0 top
S26  Q  [CHERRY-MX]  108.58,85.09 0 top
S27  W  [CHERRY-MX@1]  127.64,85.09 0 top
S28  E  [CHERRY-MX]  146.69,85.09 0 top
S29  R  [CHERRY-MX]  165.74,85.09 0 top
S30  T  [CHERRY-MX]  184.78,85.09 0 top
S31  LCtrl  [CHERRY-MX]  81.91,66.04 0 top
S32  A  [CHERRY-MX]  108.58,66.04 0 top
S33  S  [CHERRY-MX]  127.64,66.04 0 top
S34  D  [CHERRY-MX]  146.69,66.04 0 top
S35  F  [CHERRY-MX]  165.74,66.04 0 top
S36  G  [CHERRY-MX]  184.78,66.04 0 top
S37  L Shift  [CHERRY-MX]  77.47,46.99 0 top
S37B  L Shift  [CHERRY-MX]  81.91,46.99 180 top
S37B1  L Shift  [CHERRY-MX]  84.45,46.99 180 top
S38  Z  [CHERRY-MX]  108.58,46.99 0 top
S39  X  [CHERRY-MX]  127.64,46.99 0 top
S40  C  [CHERRY-MX]  146.69,46.99 0 top
S41  V  [CHERRY-MX]  165.74,46.99 0 top
S42  B  [CHERRY-MX]  184.78,46.99 0 top
S43  Caps Lock  [CHERRY-MX-LED]  83.18,27.94 0 top
S44  Alt  [CHERRY-MX]  104.77,27.94 0 top
S45  Menu(Win)  [CHERRY-MX]  128.91,27.94 0 top
S46  Space  [CHERRY-MX]  167.64,27.94 0 top
S47  F7  [CHERRY-MX]  219.08,130.81 0 top
S48  F8  [CHERRY-MX]  238.12,130.81 0 top
S49  F9  [CHERRY-MX]  264.8,130.81 0 top
S50  F10  [CHERRY-MX]  283.85,130.81 0 top
S51  F11  [CHERRY-MX]  302.89,130.81 0 top
S52  F12  [CHERRY-MX]  321.94,130.81 0 top
S53  7  [CHERRY-MX]  219.08,104.14 0 top
S54  8  [CHERRY-MX]  238.12,104.14 0 top
S55  9  [CHERRY-MX]  257.18,104.14 0 top
S56  0  [CHERRY-MX]  276.23,104.14 180 top
S57  -  [CHERRY-MX]  295.28,104.14 180 top
S58  =  [CHERRY-MX]  314.32,104.14 180 top
S59  BS  [CHERRY-MX]  342.9,104.14 180 top
S60  Y  [CHERRY-MX]  219.08,85.09 0 top
S61  U  [CHERRY-MX]  238.12,85.09 0 top
S62  I  [CHERRY-MX]  257.18,85.09 0 top
S63  O  [CHERRY-MX]  276.23,85.09 0 top
S64  P  [CHERRY-MX]  295.28,85.09 0 top
S65  [  [CHERRY-MX]  314.32,85.09 0 top
S66  ]  [CHERRY-MX]  333.38,85.09 0 top
S67  |  [CHERRY-MX]  333.38,46.99 180 top
S67B  |  [CHERRY-MX]  357.5,85.09 180 top
S67C  |  [CHERRY-MX]  352.43,85.09 180 top
S68  H  [CHERRY-MX]  219.08,66.04 0 top
S69  J  [CHERRY-MX]  238.12,66.04 0 top
S70  K  [CHERRY-MX]  257.18,66.04 0 top
S71  L  [CHERRY-MX]  276.23,66.04 0 top
S72  :  [CHERRY-MX]  295.28,66.04 0 top
S73  "  [CHERRY-MX]  314.32,66.04 0 top
S74  Del  [CHERRY-MX]  352.43,130.81 0 top
S74A  Enter  [CHERRY-MX]  346.71,66.04 0 top
S74B  Enter  [CHERRY-MX]  342.9,66.04 0 top
S75  N  [CHERRY-MX]  219.08,46.99 0 top
S76  M  [CHERRY-MX]  238.12,46.99 0 top
S77  <  [CHERRY-MX]  257.18,46.99 0 top
S78  >  [CHERRY-MX]  276.23,46.99 0 top
S79  ~  [CHERRY-MX]  295.28,46.99 0 top
S80  ?  [CHERRY-MX]  314.32,46.99 0 top
S81  R Shift  [CHERRY-MX]  352.43,46.99 180 top
S82  Space  [CHERRY-MX]  236.22,27.94 0 top
S83  Mouse2(Menu)  [CHERRY-MX]  282.57,27.94 0 top
S84  Alt  [CHERRY-MX]  306.7,27.94 180 top
S85  RCtrl  [CHERRY-MX]  330.84,27.94 180 top
S86  PrtScr  [CHERRY-MX]  352.43,27.94 180 top
S87  Num  [CHERRY-MX-4P]  9.53,327.66 180 top
S88  D  [CHERRY-MX-4P]  28.57,327.66 180 top
S89  E  [CHERRY-MX-4P]  47.62,327.66 180 top
S90  F  [CHERRY-MX-4P]  66.67,327.66 180 top
S91  /  [CHERRY-MX-4P]  85.72,327.66 180 top
S92  A  [CHERRY-MX-4P]  28.57,308.61 180 top
S93  B  [CHERRY-MX-4P]  47.62,308.61 180 top
S94  C  [CHERRY-MX-4P]  66.67,308.61 180 top
S95  *  [CHERRY-MX-4P]  85.72,308.61 180 top
S96  7  [CHERRY-MX-4P]  28.57,289.56 180 top
S97  8  [CHERRY-MX-4P]  47.62,289.56 180 top
S98  9  [CHERRY-MX-4P]  66.67,289.56 180 top
S99  -  [CHERRY-MX-4P]  85.72,289.56 180 top
S100  4  [CHERRY-MX-4P]  28.57,270.51 180 top
S101  5  [CHERRY-MX-4P]  47.62,270.51 180 top
S102  6  [CHERRY-MX-4P]  66.67,270.51 180 top
S103  +  [CHERRY-MX-4P]  85.72,270.51 180 top
S104  1  [CHERRY-MX-4P]  28.57,251.46 180 top
S105  2  [CHERRY-MX-4P]  47.62,251.46 180 top
S106  3  [CHERRY-MX-4P]  66.67,251.46 180 top
S107  NumEnter  [CHERRY-MX-4P]  86.36,250.83 180 top
S107B  NumEnter  [CHERRY-MX]  85.72,241.94 90 top
S107B1  NumEnter  [CHERRY-MX-4P]  478.16,37.46 90 top
S108  0  [CHERRY-MX-4P]  28.57,232.41 180 top
S109  00  [CHERRY-MX-4P]  47.62,232.41 180 top
S110  .  [CHERRY-MX-4P]  66.67,232.41 180 top
S111  D  [CHERRY-MX-4P]  421,123.19 180 top
S112  E  [CHERRY-MX-4P]  440.06,123.19 180 top
S113  F  [CHERRY-MX-4P]  459.11,123.19 180 top
S114  /  [CHERRY-MX-4P]  478.16,123.19 180 top
S115  A  [CHERRY-MX-4P]  421,104.14 180 top
S116  B  [CHERRY-MX-4P]  440.06,104.14 180 top
S117  C  [CHERRY-MX-4P]  459.11,104.14 180 top
S118  *  [CHERRY-MX-4P]  478.16,104.14 180 top
S119  7  [CHERRY-MX-4P]  421,85.09 180 top
S120  8  [CHERRY-MX-4P]  440.06,85.09 180 top
S121  9  [CHERRY-MX-4P]  459.11,85.09 180 top
S122  -  [CHERRY-MX-4P]  478.16,85.09 180 top
S123  4  [CHERRY-MX-4P]  421,66.04 180 top
S124  5  [CHERRY-MX-4P]  440.06,66.04 180 top
S125  6  [CHERRY-MX-4P]  459.11,66.04 180 top
S126  +  [CHERRY-MX-4P]  478.16,66.04 180 top
S127  1  [CHERRY-MX-4P]  421,46.99 180 top
S128  2  [CHERRY-MX-4P]  440.06,46.99 180 top
S129  3  [CHERRY-MX-4P]  459.11,46.99 180 top
S130  NumEnter  [CHERRY-MX-4P]  478.16,46.99 180 top
S131  0  [CHERRY-MX-4P]  421,27.94 180 top
S132  00  [CHERRY-MX-4P]  440.06,27.94 180 top
S133  .  [CHERRY-MX-4P]  459.11,27.94 180 top
S134  NumLock  [B3F-31XX]  436.25,141.92 180 top
SV1  [FE09]  453.71,146.37 0 top
SV2  [FE06]  42.55,344.17 0 top  (outside the outline)
SV3  [FE07]  24.76,344.17 0 top  (outside the outline)
U$1  [18X18]  26.04,130.81 0 top
U$2  [18X18]  45.09,130.81 0 top
U$3  [18X18]  26.04,111.76 0 top
U$4  [18X18]  26.04,92.71 0 top
U$5  [18X18]  45.09,111.76 0 top
U$6  [18X18]  26.04,73.66 0 top
U$7  [18X18]  45.09,92.71 0 top
U$8  [18X18]  45.09,73.66 0 top
U$9  [18X18]  64.13,27.94 0 top
U$10  [18X18]  45.09,27.94 90 top
U$11  [18X18]  45.09,46.99 90 top
U$12  [18X18]  127.64,46.99 90 top
U$13  [18X18]  26.04,27.94 90 top
U$14  [18X18]  83.18,27.94 90 top
U$15  [18X23]  104.77,27.94 0 top
U$16  [18X23]  128.91,27.94 0 top
U$17  [18X52]  167.64,27.94 0 top
U$18  [18X18]  108.58,46.99 0 top
U$19  [18X18]  184.78,46.99 0 top
U$20  [18X18]  165.74,46.99 0 top
U$21  [18X18]  146.69,46.99 0 top
U$22  [18X42]  77.47,46.99 0 top
U$23  [18X18]  127.64,66.04 90 top
U$24  [18X18]  108.58,66.04 0 top
U$25  [18X18]  184.78,66.04 0 top
U$26  [18X18]  165.74,66.04 0 top
U$27  [18X18]  146.69,66.04 0 top
U$28  [18X33]  81.91,66.04 0 top
U$29  [18X18]  127.64,85.09 90 top
U$30  [18X18]  108.58,85.09 0 top
U$31  [18X18]  184.78,85.09 0 top
U$32  [18X18]  165.74,85.09 0 top
U$33  [18X18]  146.69,85.09 0 top
U$34  [18X28]  84.45,85.09 0 top
U$35  [18X18]  127.64,104.14 90 top
U$36  [18X18]  108.58,104.14 0 top
U$37  [18X18]  184.78,104.14 0 top
U$38  [18X18]  165.74,104.14 0 top
U$39  [18X18]  146.69,104.14 0 top
U$40  [18X18]  89.53,104.14 0 top
U$41  [18X18]  184.78,130.81 0 top
U$42  [18X18]  165.74,130.81 0 top
U$43  [18X18]  120.02,130.81 0 top
U$44  [18X18]  139.06,130.81 0 top
U$45  [18X18]  100.96,130.81 0 top
U$46  [18X18]  81.91,130.81 0 top
U$47  [18X18]  217.81,132.08 0 top
U$48  [18X18]  236.86,132.08 0 top
U$49  [18X18]  301.62,132.08 0 top
U$50  [18X18]  263.53,132.08 0 top
U$51  [18X18]  282.57,132.08 0 top
U$52  [18X18]  320.68,132.08 0 top
U$53  [18X18]  217.81,105.41 0 top
U$54  [18X18]  236.86,105.41 0 top
U$55  [18X18]  255.91,105.41 0 top
U$56  [18X18]  274.95,105.41 0 top
U$57  [18X18]  294,105.41 0 top
U$58  [18X18]  313.06,105.41 0 top
U$59  [18X18]  217.81,86.36 0 top
U$60  [18X18]  236.86,86.36 0 top
U$61  [18X18]  255.91,86.36 0 top
U$62  [18X18]  274.95,86.36 0 top
U$63  [18X18]  294,86.36 0 top
U$64  [18X18]  313.06,86.36 0 top
U$65  [18X18]  332.11,86.36 0 top
U$66  [18X18]  351.16,86.36 0 top
U$67  [18X18]  217.81,67.31 0 top
U$68  [18X18]  236.86,67.31 0 top
U$69  [18X18]  255.91,67.31 0 top
U$70  [18X18]  274.95,67.31 0 top
U$71  [18X18]  294,67.31 0 top
U$72  [18X18]  313.06,67.31 0 top
U$73  [18X18]  217.81,48.26 0 top
U$74  [18X18]  236.86,48.26 0 top
U$75  [18X18]  255.91,48.26 0 top
U$76  [18X18]  274.95,48.26 0 top
U$77  [18X18]  294,48.26 0 top
U$78  [18X18]  313.06,48.26 0 top
U$79  [18X52]  236.22,27.94 0 top
U$80  [18X37]  342.9,104.14 0 top
U$81  [18X18]  419.74,124.46 0 top
U$82  [18X18]  438.79,124.46 0 top
U$83  [18X18]  351.16,29.21 0 top
U$84  [18X23]  330.84,27.94 0 top
U$85  [18X23]  306.7,27.94 0 top
U$86  [18X23]  282.57,27.94 0 top
U$87  [18X18]  8.26,328.93 0 top
U$88  [18X18]  27.3,328.93 0 top
U$89  [18X18]  46.36,328.93 0 top
U$90  [18X18]  65.41,328.29 0 top
U$91  [18X18]  84.45,328.93 0 top
U$92  [18X18]  84.45,309.88 0 top
U$93  [18X18]  65.41,309.88 0 top
U$94  [18X18]  46.36,309.88 0 top
U$95  [18X18]  27.3,309.88 0 top
U$96  [18X18]  27.3,290.83 0 top
U$97  [18X18]  46.36,290.83 0 top
U$98  [18X18]  65.41,290.83 0 top
U$99  [18X18]  84.45,290.83 0 top
U$100  [18X18]  27.3,271.78 0 top
U$101  [18X18]  46.36,271.78 0 top
U$102  [18X18]  65.41,271.78 0 top
U$103  [18X18]  84.45,271.78 0 top
U$104  [18X18]  27.3,252.73 0 top
U$105  [18X18]  46.36,252.73 0 top
U$106  [18X18]  65.41,252.73 0 top
U$107  [18X18]  84.45,252.73 0 top
U$108  [18X18]  27.3,233.68 0 top
U$109  [18X18]  46.36,233.68 0 top
U$110  [18X18]  65.41,233.68 0 top
U$111  [37X18]  85.72,241.94 0 top
U$112  [18X37]  342.9,66.04 0 top
U$113  [18X28]  357.5,85.09 0 top
U$114  [18X33]  81.91,46.99 0 top
U$115  [18X28]  84.45,46.99 0 top
U$116  [18X18]  351.16,132.08 0 top
U$117  [18X18]  332.11,48.26 0 top
U$118  [18X18]  351.16,48.26 0 top
U$119  [18X18]  457.84,124.46 0 top
U$120  [18X18]  476.88,124.46 0 top
U$121  [18X18]  476.88,105.41 0 top
U$122  [18X18]  457.84,105.41 0 top
U$123  [18X18]  438.79,105.41 0 top
U$124  [18X18]  419.74,105.41 0 top
U$125  [18X18]  419.74,86.36 0 top
U$126  [18X18]  438.79,86.36 0 top
U$127  [18X18]  457.84,86.36 0 top
U$128  [18X18]  476.88,86.36 0 top
U$129  [18X18]  419.74,67.31 0 top
U$130  [18X18]  438.79,67.31 0 top
U$131  [18X18]  457.84,67.31 0 top
U$132  [18X18]  476.88,67.31 0 top
U$133  [18X18]  419.74,48.26 0 top
U$134  [18X18]  438.79,48.26 0 top
U$135  [18X18]  457.84,48.26 0 top
U$136  [18X18]  476.88,48.26 0 top
U$137  [18X18]  419.74,29.21 0 top
U$138  [18X18]  438.79,29.21 0 top
U$139  [18X18]  457.84,29.21 0 top
U$140  [37X18]  478.16,37.46 0 top
U$141  [18X18]  476.88,29.21 0 top
U$142  [KEY]  461.64,46.99 0 top
U$143  [KEY]  461.64,27.94 0 top
U$144  [KEY]  442.6,46.99 0 top
U$145  [KEY]  442.6,27.94 0 top
U$146  [KEY]  423.55,27.94 0 top
U$147  [KEY]  423.55,46.99 0 top
U$148  [KEY]  461.64,66.04 0 top
U$149  [NUMENTER]  480.69,37.46 0 top
U$150  [KEY]  442.6,66.04 0 top
U$151  [KEY]  423.55,66.04 0 top
U$152  [KEY]  480.69,66.04 0 top
U$153  [KEY]  480.69,85.09 0 top
U$154  [KEY]  461.64,85.09 0 top
U$155  [KEY]  442.6,85.09 0 top
U$156  [KEY]  423.55,85.09 0 top
U$157  [KEY]  423.55,104.14 0 top
U$158  [KEY]  442.6,104.14 0 top
U$159  [KEY]  461.64,104.14 0 top
U$160  [KEY]  480.69,104.14 0 top
U$161  [KEY]  480.69,123.19 0 top
U$162  [KEY]  461.64,123.19 0 top
U$163  [KEY]  442.6,123.19 0 top
U$164  [KEY]  423.55,123.19 0 top
U$165  [SIZE132]  385.13,86.68 0 top

## Library data of the parts
1S1 1S1O 1S2 1S2O 1S3 1S3O 1S4 1S4O 2S1-2S4 SV2 SV3 = con-lsta; OC_FARNELL: unknown; OC_NEWARK: unknown
3D1 3D2 D1-D64 D64B D65-D136 J1-J17 JA13-JA74 JA74B JA75-JA133 JB1 JB3 JB18-JB74 JB74B JB75-JB133 LED1 = detali
C1 C2 R1-R8 = rcl
HL1-HL4 = led
IC1 = atmel; MPN: ATMEGA8-16AU; OC_FARNELL: 9171371; OC_NEWARK: 73M8863
JA1-JA12 JB2 JB4-JB17 = jumper
S1-S37 S37B S37B1 S38-S67 S67B S67C S68-S74 S74A S74B S75-S107 S107B S107B1 S108-S133 = cherrymx
S134 = detali; MPN: B3F-3100; OC_FARNELL: 959704; OC_NEWARK: 36M3582
SV1 = detali; OC_FARNELL: unknown; OC_NEWARK: unknown
U$1-U$141 = kbmx
U$142-U$165 = kbmxco

## Nets
2A1: JA61.2
2A2: 2S3.2 JA47.2 JA60.2
2A3: JA69.2
2A4: 2S3.4 JA68.2 JA82.2
2A5: JA76.2
2A6: 2S3.6 JA75.2 JA83.2
2A7: 2S3.7 JA48.2
2A8: 2S3.8 JA53.2 JA54.2
2B0: 2S1.1 D53.C
2B1: 2S1.2 D54.C
2B4: 2S1.5 D60.C D61.C D68.C D69.C D75.C D76.C
2B6: 2S1.7 D47.C D48.C D83.C
2B10: 2S2.1 D82.C
3A1: JA89.2 JA96.2 JA97.2 JA98.2 JA103.2 SV2.1
3A2: JA100.2 JA101.2 JA102.2 SV2.2
3A3: JA88.2 JA90.2 JA92.2 JA104.2 JA105.2 JA106.2 JA107.2 SV2.3
3A4: JA108.2 JA110.2 SV2.4
3A5: JA87.2 JA91.2 JA94.2 JA95.2 SV2.5
3A6: JA93.2 JA99.2 SV2.6
3B0: D92.C SV3.1
3B2: D88.C D89.C D94.C SV3.2
3B3: D90.C D93.C SV3.3
3B7: D103.C D107.C SV3.4
3B8: D95.C D98.C D99.C D102.C D106.C D110.C SV3.5
3B9: D91.C D97.C D101.C D105.C D108.C SV3.6
3B10: D87.C D96.C D100.C D104.C SV3.7
+5V: 3D1.16 C1.1 D136.A R4.2 R5.2 R6.2 R7.1 SV1.9
+5V_K1: 1S4.4 R1.1 R2.1
A1: 1S3.1 JA1.2 JA26.2 JA28.2 JA29.2
A2: 1S3.2 1S3O.2 JA15.2 JA25.2 JA30.2 JA37.2 JA43.2 JA45.2
A3: 1S3.3 JA27.2 JA32.2 JA33.2 JA34.2 JA35.2
A4: 1S3.4 JA2.2 JA9.2 JA16.2 JA18.2 JA36.2 JA44.2 JA46.2
A5: 1S3.5 JA38.2 JA39.2 JA40.2 JA41.2
A6: 1S3.6 JA10.2 JA11.2 JA12.2 JA42.2
A7: 1S3.7 D24.A JA3.2 JA5.2 JA6.2 JA13.2 JA14.2 JA23.2 JA31.2
A8: 1S3.8 JA4.2 JA7.2 JA8.2 JA17.2 JA19.2 JA20.2 JA21.2 JA22.2
AVCC: IC1.18
B0: 1S1.1 D2.C D25.C D26.C D32.C D38.C
B1: 1S1.2 D13.C D33.C D39.C D43.C HL1.4 HL2.4
B2: 1S1.3 D14.C D15.C D16.C D28.C D34.C D40.C HL3.4
B3: 1S1.4 D23.C D29.C D30.C D35.C D36.C D41.C D42.C
B4: 1S1.5 D19.C JA24.2
B5: 1S1.6 D18.C D20.C
B6: 1S1.7 1S2O.5 D21.C
B7: 1S1.8 D5.C D7.C D9.C D10.C
B8: 1S1.9 D6.C D8.C
B9: 1S1.10 D3.C D12.C
B10: 1S2.1 D11.C D46.C
B11: 1S2.2 D37.C
B12: 1S2.3
B13: 1S2.4 D22.C
B14: 1S2.5 D1.C D4.C D27.C D44.C
B15: 1S2.6 D17.C D31.C
B16: 1S2.7 D45.C
B17: 1S2.8
COLN1: 3D2.12 SV1.2
COLN2: 3D2.6 J15.1
COLN3: 3D2.8 SV1.3
G1: HL1.3 HL2.3
G2: HL3.3
GND: 3D1.4 3D1.5 3D1.8 3D2.7 C1.2 C2.2 IC1.3 IC1.5 IC1.21 LED1.K SV1.1
GND_K1: 1S4.5
GND_K2: R3.1
K1: HL1.2 HL3.2
LED_CAPS: 1S4.3 S43.LED2
LED_NUM: 1S4.1
LED_SCR: 1S4.2 S1.LED2
N$1: D15.A JB15.1
N$2: JB4.2 S4.SW1
N$3: D1.A JB1.1
N$4: JA4.1 S4.SW2
N$5: JB14.2 S14.SW1
N$6: JB20.2 S20.SW1
N$7: JB32.2 S32.SW1
N$8: JB38.2 S38.SW1
N$9: JB6.2 S6.SW1
N$10: JA6.1 S6.SW2
N$11: JA8.1 S8.SW2
N$12: JB8.2 S8.SW1
N$13: JB10.2 S10.SW1
N$14: JB1.2 S1.SW1
N$15: D2.A JB2.1
N$16: JB2.2 S2.SW2
N$17: JA2.1 S2.SW1
N$18: D16.A JB16.1
N$19: JB3.2 S3.SW1
N$20: JB5.2 S5.SW1
N$21: JB7.2 S7.SW1
N$22: JB9.2 S9.SW1
N$23: JB11.2 S11.SW1
N$24: D3.A JB3.1
N$25: JB12.2 S12.SW1
N$26: D5.A JB5.1
N$27: D7.A JB7.1
N$28: JA10.1 S10.SW2
N$29: JA1.1 S1.SW2
N$30: D9.A JB9.1
N$31: D11.A JB11.1
N$32: JA3.1 S3.SW2
N$33: JA5.1 S5.SW2
N$34: JA7.1 S7.SW2
N$35: JA9.1 S9.SW2
N$36: JA11.1 S11.SW2
N$37: JA12.1 S12.SW2
N$38: JA14.1 S14.SW2
N$39: JB13.2 S13.SW1
N$40: JA13.1 S13.SW2
N$41: D14.A JB14.1
N$42: JB42.2 S42.SW2
N$43: JA42.1 S42.SW1
N$44: JB27.2 S27.SW1
N$45: JA27.1 S27.SW2
N$46: JB17.2 S17.SW2
N$47: JA17.1 S17.SW1
N$48: D24.C JB24.1
N$49: JB24.2 S24.SW2
N$50: JA24.1 S24.SW1
N$51: JA107.1 S107.SW2 S107B.SW2
N$52: D4.A JB4.1
N$53: D6.A JB6.1
N$54: D8.A JB8.1
N$55: D10.A JB10.1
N$56: D12.A JB12.1
N$57: D13.A JB13.1
N$58: JB19.2 S19.SW1
N$59: JB25.2 S25.SW1
N$60: D104.A JB104.1
N$61: JB31.2 S31.SW1
N$62: JB37.2 S37.SW1 S37B1.SW1 S37B.SW1
N$63: JB43.2 S43.SW1
N$64: JB26.2 S26.SW1
N$65: JB44.2 S44.SW1
N$66: JB18.2 S18.SW1
N$68: JB30.2 S30.SW1
N$69: JB36.2 S36.SW1
N$70: JB74B.2 S74.SW1
N$71: JB52.2 S52.SW1
N$72: JB23.2 S23.SW1
N$73: JB29.2 S29.SW1
N$74: JB35.2 S35.SW1
N$75: JB41.2 S41.SW1
N$76: JB16.2 S16.SW1
N$77: JB22.2 S22.SW1
N$78: JB28.2 S28.SW1
N$79: JB34.2 S34.SW1
N$80: JB40.2 S40.SW1
N$81: JB46.2 S46.SW1
N$82: JB15.2 S15.SW1
N$83: JB21.2 S21.SW1
N$84: JB63.2 S63.SW1
N$85: JB33.2 S33.SW1
N$86: JB39.2 S39.SW1
N$87: JB45.2 S45.SW1
N$88: JA15.1 S15.SW2
N$89: JB73.2 S73.SW1
N$90: JA18.1 S18.SW2
N$91: JA20.1 S20.SW2
N$92: JA22.1 S22.SW2
N$93: JA23.1 S23.SW2
N$94: JB74.2 S74A.SW1 S74B.SW1
N$95: JA25.1 S25.SW2
N$96: JA26.1 S26.SW2
N$97: JA74.1 S74A.SW2 S74B.SW2
N$98: JA28.1 S28.SW2
N$99: JA29.1 S29.SW2
N$100: JA30.1 S30.SW2
N$101: JA31.1 S31.SW2
N$102: JA32.1 S32.SW2
N$103: JA33.1 S33.SW2
N$104: JA34.1 S34.SW2
N$105: JA35.1 S35.SW2
N$106: JA36.1 S36.SW2
N$107: JA37.1 S37.SW2 S37B1.SW2 S37B.SW2
N$108: JA38.1 S38.SW2
N$109: JA39.1 S39.SW2
N$110: JA40.1 S40.SW2
N$111: JA41.1 S41.SW2
N$112: JB47.2 S47.SW1
N$113: JA43.1 S43.SW2
N$114: JA45.1 S45.SW2
N$115: JA46.1 S46.SW2
N$116: JA19.1 S19.SW2
N$117: JA44.1 S44.SW2
N$118: JA21.1 S21.SW2
N$119: JA16.1 S16.SW2
N$120: D17.A JB17.1
N$121: D18.A JB18.1
N$122: D19.A JB19.1
N$123: D20.A JB20.1
N$124: D21.A JB21.1
N$125: D22.A JB22.1
N$126: D23.A JB23.1
N$127: JB53.2 S53.SW1
N$128: D25.A JB25.1
N$129: D26.A JB26.1
N$130: D27.A JB27.1
N$131: D28.A JB28.1
N$132: D29.A JB29.1
N$133: D30.A JB30.1
N$134: D31.A JB31.1
N$135: D32.A JB32.1
N$136: D33.A JB33.1
N$137: D34.A JB34.1
N$138: D35.A JB35.1
N$139: D36.A JB36.1
N$140: D37.A JB37.1
N$141: D38.A JB38.1
N$142: D39.A JB39.1
N$143: D40.A JB40.1
N$144: D41.A JB41.1
N$145: D42.A JB42.1
N$146: D43.A JB43.1
N$147: D44.A JB44.1
N$148: D45.A JB45.1
N$149: D46.A JB46.1
N$150: R1.2 S1.LED1
N$151: R2.2 S43.LED1
N$152: R3.2
N$153: JB60.2 S60.SW1
N$154: JB68.2 S68.SW1
N$155: JB75.2 S75.SW1
N$156: JB82.2 S82.SW1
N$157: JB48.2 S48.SW1
N$158: JB54.2 S54.SW1
N$159: JB61.2 S61.SW1
N$160: JB69.2 S69.SW1
N$161: JB76.2 S76.SW1
N$162: JB83.2 S83.SW1
N$163: JB49.2 S49.SW1
N$164: JB55.2 S55.SW1
N$165: JB62.2 S62.SW1
N$166: JB70.2 S70.SW1
N$167: JB77.2 S77.SW1
N$168: JB84.2 S84.SW1
N$169: JB50.2 S50.SW1
N$170: JB56.2 S56.SW1
N$171: JB71.2 S71.SW1
N$172: JB78.2 S78.SW1
N$173: JB85.2 S85.SW1
N$174: JB51.2 S51.SW1
N$175: JB57.2 S57.SW1
N$176: JB64.2 S64.SW1
N$177: JB72.2 S72.SW1
N$178: JB79.2 S79.SW1
N$179: JB86.2 S86.SW1
N$180: JB58.2 S58.SW1
N$181: JB65.2 S65.SW1
N$182: JB80.2 S80.SW1
N$183: JB59.2 S59.SW1
N$184: JB66.2 S66.SW1
N$185: JB67.2 S67.SW1 S67B.SW1 S67C.SW2
N$186: JB81.2 S81.SW1
N$187: D47.A JB47.1
N$188: D53.A JB53.1
N$189: D60.A JB60.1
N$190: D68.A JB68.1
N$191: D75.A JB75.1
N$192: D82.A JB82.1
N$193: D48.A JB48.1
N$194: D54.A JB54.1
N$195: D61.A JB61.1
N$196: D69.A JB69.1
N$197: D76.A JB76.1
N$198: D83.A JB83.1
N$199: D49.A JB49.1
N$200: D55.A JB55.1
N$201: D62.A JB62.1
N$202: D70.A JB70.1
N$203: D77.A JB77.1
N$204: D84.A JB84.1
N$205: D50.A JB50.1
N$206: D56.A JB56.1
N$207: D63.A JB63.1
N$208: D71.A JB71.1
N$209: D78.A JB78.1
N$210: D85.A JB85.1
N$211: D51.A JB51.1
N$212: D57.A JB57.1
N$213: D64.A JB64.1
N$214: D72.A JB72.1
N$215: D79.A JB79.1
N$216: D86.A JB86.1
N$217: D52.A JB52.1
N$218: D58.A JB58.1
N$219: D65.A JB65.1
N$220: D73.A JB73.1
N$221: D80.A JB80.1
N$222: D59.A JB59.1
N$223: D66.A JB66.1
N$224: D67.A JB67.1
N$225: D74.A JB74.1
N$226: D81.A JB81.1
N$227: JA66.1 S66.SW2
N$228: JA47.1 S47.SW2
N$229: JA53.1 S53.SW2
N$230: JA60.1 S60.SW2
N$231: JA68.1 S68.SW2
N$232: JA75.1 S75.SW2
N$233: JA82.1 S82.SW2
N$234: JA48.1 S48.SW2
N$235: JA54.1 S54.SW2
N$236: JA61.1 S61.SW2
N$237: JA69.1 S69.SW2
N$238: JA76.1 S76.SW2
N$239: JA83.1 S83.SW2
N$240: JA49.1 S49.SW2
N$241: JA55.1 S55.SW2
N$242: JA62.1 S62.SW2
N$243: JA70.1 S70.SW2
N$244: JA77.1 S77.SW2
N$245: JA84.1 S84.SW2
N$246: JA50.1 S50.SW2
N$247: JA56.1 S56.SW2
N$248: JA63.1 S63.SW2
N$249: JA71.1 S71.SW2
N$250: JA78.1 S78.SW2
N$251: JA85.1 S85.SW2
N$252: JA51.1 S51.SW2
N$253: JA57.1 S57.SW2
N$254: JA64.1 S64.SW2
N$255: JA72.1 S72.SW2
N$256: JA79.1 S79.SW2
N$257: JA86.1 S86.SW2
N$258: JA52.1 S52.SW2
N$259: JA58.1 S58.SW2
N$260: JA65.1 S65.SW2
N$261: JA73.1 S73.SW2
N$262: JA80.1 S80.SW2
N$263: JA81.1 S81.SW2
N$264: JA67.1 S67.SW2 S67B.SW2 S67C.SW1
N$265: JA59.1 S59.SW2
N$266: D64B.A JB74B.1
N$267: JA74B.1 S74.SW2
N$268: D87.A JB87.1
N$269: D88.A JB88.1
N$270: JB87.2 S87.SW1
N$271: JB88.2 S88.SW1
N$272: JA87.1 S87.SW2
N$273: JA88.1 S88.SW2
N$274: D89.A JB89.1
N$275: JB89.2 S89.SW1
N$276: JA89.1 S89.SW2
N$277: D90.A JB90.1
N$278: JB90.2 S90.SW1
N$279: JA90.1 S90.SW2
N$280: D91.A JB91.1
N$281: JB91.2 S91.SW1
N$282: JA91.1 S91.SW2
N$283: JB92.2 S92.SW1
N$284: D92.A JB92.1
N$285: JA92.1 S92.SW2
N$286: JA93.1 S93.SW2
N$287: JB93.2 S93.SW1
N$288: D93.A JB93.1
N$289: D94.A JB94.1
N$290: JB94.2 S94.SW1
N$291: JA94.1 S94.SW2
N$292: D95.A JB95.1
N$293: JB95.2 S95.SW1
N$294: JA95.1 S95.SW2
N$295: D96.A JB96.1
N$296: JB96.2 S96.SW1
N$297: JA96.1 S96.SW2
N$298: JB97.2 S97.SW1
N$299: JA97.1 S97.SW2
N$300: D97.A JB97.1
N$301: D98.A JB98.1
N$302: JB98.2 S98.SW1
N$303: JA98.1 S98.SW2
N$304: D99.A JB99.1
N$305: JB99.2 S99.SW1
N$306: JA99.1 S99.SW2
N$307: D100.A JB100.1
N$308: JB100.2 S100.SW1
N$309: JA100.1 S100.SW2
N$310: JB101.2 S101.SW1
N$311: D101.A JB101.1
N$312: JA101.1 S101.SW2
N$313: D102.A JB102.1
N$314: JB102.2 S102.SW1
N$315: JA102.1 S102.SW2
N$316: D103.A JB103.1
N$317: JB103.2 S103.SW1
N$318: JA103.1 S103.SW2
N$319: JB107.2 S107.SW1 S107B.SW1
N$320: JB104.2 S104.SW1
N$321: JA104.1 S104.SW2
N$322: JB105.2 S105.SW1
N$323: D105.A JB105.1
N$324: JA105.1 S105.SW2
N$325: D106.A JB106.1
N$326: JB106.2 S106.SW1
N$327: JA106.1 S106.SW2
N$328: D107.A JB107.1
N$329: JB108.2 S108.SW1
N$330: JA108.1 S108.SW2
N$331: D108.A JB108.1
N$332: JB109.2 S109.SW1
N$333: D109.A JB109.1
N$334: JA109.1 S109.SW2
N$335: D110.A JB110.1
N$336: JB110.2 S110.SW1
N$337: JA110.1 S110.SW2
N$338: D112.A S134.1
N$339: JA111.1 S111.SW2
N$340: D113.A JB112.1
N$341: JB112.2 S112.SW1
N$342: JA112.1 S112.SW2
N$343: D111.A JB111.1
N$344: JB111.2 S111.SW1
N$345: D114.A JB113.1
N$346: JB113.2 S113.SW1
N$347: JA113.1 S113.SW2
N$348: D115.A JB114.1
N$349: JB114.2 S114.SW1
N$350: JA114.1 S114.SW2
N$351: JB115.2 S115.SW1
N$352: D116.A JB115.1
N$353: JA115.1 S115.SW2
N$354: JA116.1 S116.SW2
N$355: JB116.2 S116.SW1
N$356: D117.A JB116.1
N$357: D118.A JB117.1
N$358: JB117.2 S117.SW1
N$359: JA117.1 S117.SW2
N$360: D119.A JB118.1
N$361: JB118.2 S118.SW1
N$362: JA118.1 S118.SW2
N$363: D120.A JB119.1
N$364: JB119.2 S119.SW1
N$365: JA119.1 S119.SW2
N$366: JB120.2 S120.SW1
N$367: JA120.1 S120.SW2
N$368: D121.A JB120.1
N$369: D122.A JB121.1
N$370: JB121.2 S121.SW1
N$371: JA121.1 S121.SW2
N$372: D123.A JB122.1
N$373: JB122.2 S122.SW1
N$374: JA122.1 S122.SW2
N$375: D124.A JB123.1
N$376: JB123.2 S123.SW1
N$377: JA123.1 S123.SW2
N$378: JB124.2 S124.SW1
N$379: D125.A JB124.1
N$380: JA124.1 S124.SW2
N$381: D126.A JB125.1
N$382: JB125.2 S125.SW1
N$383: JA125.1 S125.SW2
N$384: D127.A JB126.1
N$385: JB126.2 S126.SW1
N$386: JA126.1 S126.SW2
N$387: JB130.2 S107B1.SW1 S130.SW1
N$388: JA130.1 S107B1.SW2 S130.SW2
N$389: D128.A JB127.1
N$390: JB127.2 S127.SW1
N$391: JA127.1 S127.SW2
N$392: JB128.2 S128.SW1
N$393: D129.A JB128.1
N$394: JA128.1 S128.SW2
N$395: D130.A JB129.1
N$396: JB129.2 S129.SW1
N$397: JA129.1 S129.SW2
N$398: JB131.2 S131.SW1
N$399: JA131.1 S131.SW2
N$400: D132.A JB131.1
N$401: JB132.2 S132.SW1
N$402: D133.A JB132.1
N$403: JA132.1 S132.SW2
N$404: D134.A JB133.1
N$405: JB133.2 S133.SW1
N$406: JA133.1 S133.SW2
N$407: 3D2.3 3D2.4 3D2.5 JA112.2 JA116.2 JA120.2 JA124.2 JA125.2 JA128.2 JA129.2 JA133.2 R5.1
N$408: D111.C D117.C D118.C J9.2
N$409: D123.C D126.C D128.C J4.1
N$410: 3D2.1 3D2.2 3D2.13 JA111.2 JA115.2 JA119.2 JA123.2 JA127.2 JA131.2 JA132.2 R4.1 S134.2
N$411: 3D1.10 D112.C D113.C D114.C
N$412: 3D1.11 D115.C J7.2
N$413: 3D1.12 D119.C J3.2
N$414: 3D1.14 D127.C D130.C D132.C
N$415: D116.C D121.C D122.C J11.2
N$416: D131.A J8.2 JA113.2 JA114.2 JA117.2 JA118.2 JA121.2 JA122.2 JA126.2
N$417: D131.C JB130.1
N$418: D124.C D129.C J2.1
N$419: J1.1 J2.2
N$420: J1.2 J3.1
N$421: 3D1.13 J4.2
N$422: D120.C D125.C J5.1
N$423: J6.2 J7.1
N$424: J5.2 J6.1
N$425: 3D2.9 3D2.10 3D2.11 J14.1 R6.1
N$426: 3D1.7 J10.1
N$427: J9.1 J10.2
N$428: J11.1 J12.1
N$429: J12.2 J13.1
N$430: 3D1.9 J13.2
N$431: 3D1.6 R7.2
N$432: 3D1.1 SV1.8
N$433: 3D1.2 SV1.7
N$434: 3D1.3 SV1.6
N$435: LED1.A R8.2
N$436: J8.1 J14.2
N$437: J15.2 J16.1
N$438: J16.2 SV1.5
N$439: J17.2 SV1.4
N$440: J17.1 R8.1
N$441: D135.A D136.C
N$442: 3D2.14 C2.1 D135.C
R1: HL1.1 HL2.1
R2: HL3.1
SCK: 3D1.15 D133.C D134.C JA130.2
VCC: IC1.4 IC1.6